# Altium PCB PCB1.PcbDoc
Units mil, origin at the board's own origin, x right, y up, seen from the top; angles counter-clockwise.
Board outline 6000 x 4000 mil, 2 copper layers (Top Layer, Bottom Layer); 71 components, 51 nets, 252 pads, 0 vias.
Unrouted connection lines stored in the file: 175.
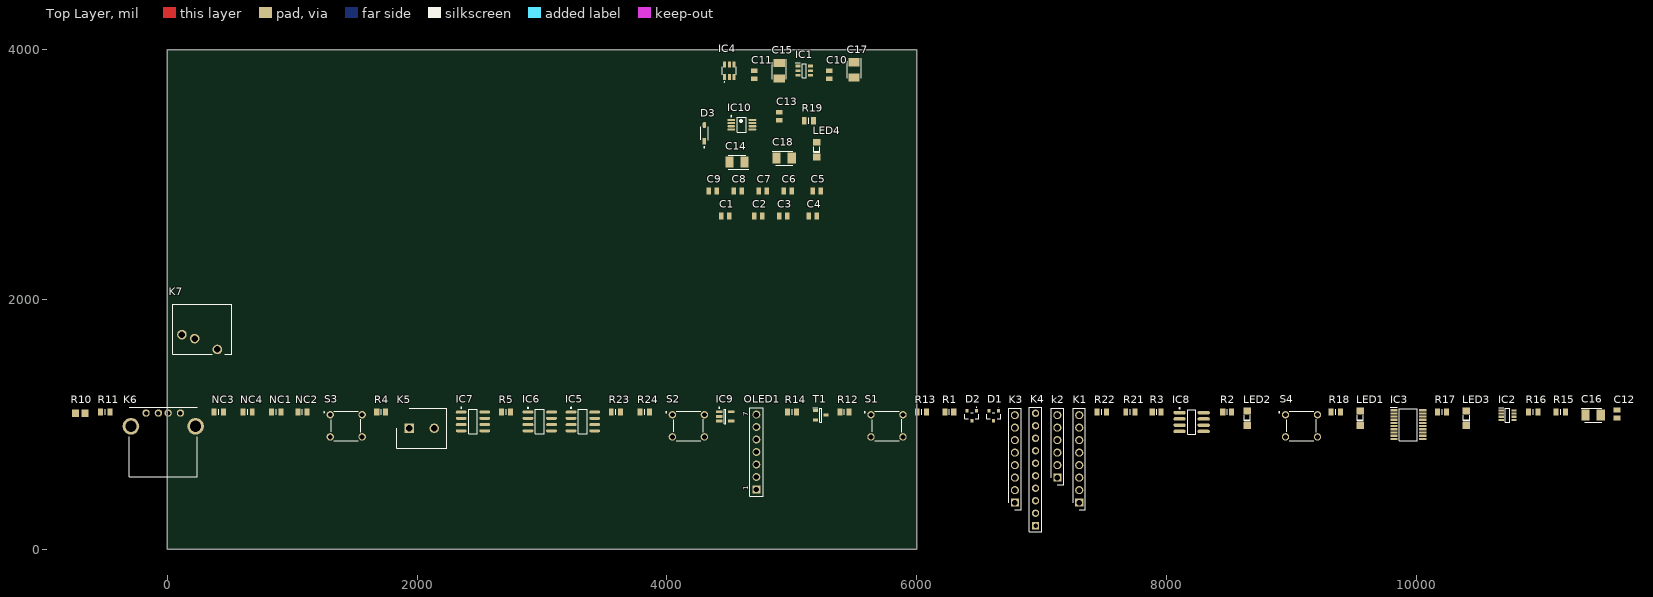
[diagram p0: Top Layer view]
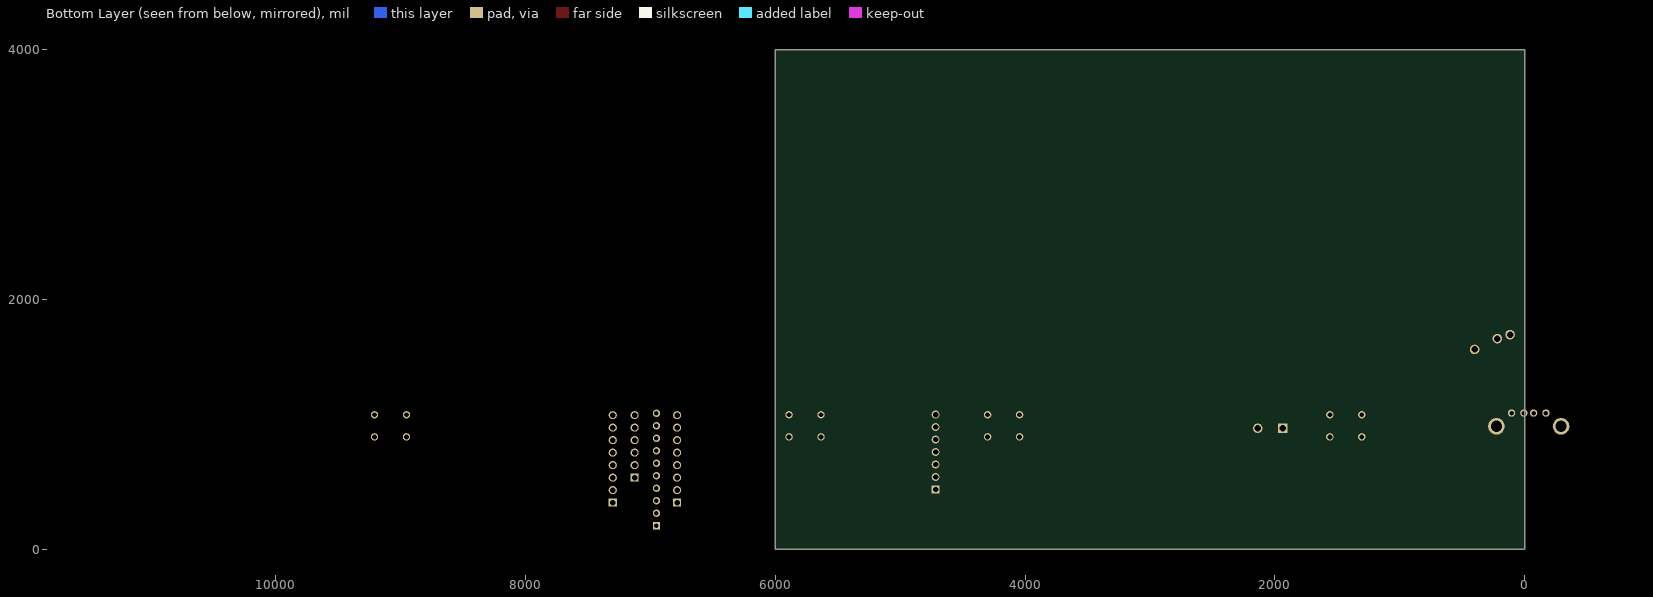
[diagram p1: Bottom Layer view, seen from below]

## Layer stack, top to bottom
Top Solder: solder mask 0.4, Solder Resist, Dk 3.5
Top Layer: signal copper 1.4
Dielectric 1: dielectric 12.6, FR-4, Dk 4.8
Bottom Layer: signal copper 1.4
Bottom Solder: solder mask 0.4, Solder Resist, Dk 3.5

## Board outline
0,0 6000,0 6000,4000 0,4000

## Design rules (kind name [scope] priority, off if disabled: settings)
Clearance [All] p1: gap=10 ignorepadtopadclearanceinfootprint=FALSE except(0: Arc-Hole Track-Hole SMDPad-Hole THPad-Hole Via-Hole Fill-Hole Poly-Hole Region-Hole Text-Hole)
PolygonConnect [All] p1: connectstyle=Relief reliefconductorwidth=10 reliefentries=4 polygonreliefangle="90 Angle" airgapwidth=10
RoomDefinition totaal [InComponentClass('totaal')] p1: confinementstyle=ConfineIn formatcopy=TRUE lockcomponents=FALSE outline 686.89,3871.89 5901.89,3871.89 5901.89,4471.89 686.89,4471.89
RoomDefinition deel2 [InComponentClass('deel2')] p2: confinementstyle=ConfineIn formatcopy=TRUE lockcomponents=FALSE outline -792.95,128.58 11752.05,128.58 11752.05,1248.58 -792.95,1248.58
RoutingVias [All] p1: holewidth=10 width=20 viastyle="Through Hole" minholewidth=10 minwidth=20 maxholewidth=10 maxwidth=20
SolderMaskExpansion [All] p1: expansion=4 istentingtop=FALSE
Width [All] p1: maxlimit=30 minlimit=10 preferedwidth=20 minimp=50.000000 maximp=50.000000 favimp=50.000000
30 further rules are at their usual default settings.

## Classes and differential pairs
component class totaal: C1 C2 C3 C4 C5 C6 C7 C8 C9 C10 C11 C13 C14 C15 C17 C18 D3 IC1 IC4 IC10 K7 LED4 R19
component class deel2: C12 C16 D1 D2 IC2 IC3 IC5 IC6 IC7 IC8 IC9 K1 k2 K3 K4 K5 K6 LED1 LED2 LED3 NC1 NC2 NC3 NC4 OLED1 R1 R2 R3 R4 R5 R10 R11 R12 R13 R14 R15 R16 R17 R18 R21 R22 R23 R24 S1 S2 S3 S4 T1

## Components (designator, comment, footprint, x,y, rotation, side; value= is the part's Value field where it differs from the comment)
C1 "MC0805B104K500CT" CAPC2012X90N 4468.11,2668.11 r180 top
C2 "MC0805B104K500CT" CAPC2012X90N 4731.89,2668.11 r180 top
C3 "MC0805B104K500CT" CAPC2012X90N 4931.89,2668.11 r180 top
C4 "MC0805B104K500CT" CAPC2012X90N 5168.11,2668.11 r180 top
C5 "MC0805B104K500CT" CAPC2012X90N 5200,2868.11 r180 top
C6 "MC0805B104K500CT" CAPC2012X90N 4968.11,2868.11 r180 top
C7 "MC0805B104K500CT" CAPC2012X90N 4768.11,2868.11 r180 top
C8 "MC0805B104K500CT" CAPC2012X90N 4568.11,2868.11 r180 top
C9 "MC0805B104K500CT" CAPC2012X90N 4368.11,2868.11 r180 top
C10 "MC0805B104K500CT" CAPC2012X90N 5300,3800 r90 top
C11 "MC0805B104K500CT" CAPC2012X90N 4700,3800 r90 top
C12 "MC0805B104K500CT" CAPC2012X90N 11607.05,1083.58 r90 top
C13 "MC0805N102J500CT" CAPC2012X90N 4900,3468.11 r90 top
C14 "T491B106M016AT" CAPPM3528X210N 4561.02,3100 r180 top
C15 "T491B106M016AT" CAPPM3528X210N 4900,3831.89 r270 top
C16 "T491B106M016AT" CAPPM3528X210N 11417.05,1073.58 r0 top
C17 "T491B106M016AT" CAPPM3528X210N 5500,3838.98 r270 top
C18 "T491B106M016AT" CAPPM3528X210N 4938.98,3131.89 r0 top
D1 "BAT54C" NXP-SOT23-3_V 6617.05,1068.58 r0 top
D2 "BAT54C" NXP-SOT23-3_V 6442.05,1068.58 r0 top
D3 "1N5819HW-7-F" FP-SOD123-IPC_B 4300,3331.89 r90 top
IC1 "LT1790ACS6-2.5#PBF" SOT95P280X100-6N 5100,3831.89 r0 top
IC2 "LTC2631CTS8-LZ12#TRMPBF" SOT65P280X100-8N 10732.05,1073.58 r0 top
IC3 "LTC2309CF#PBF" SOP65P640X110-20N 9937.05,998.58 r0 top
IC4 "LT1790BCS6-1.25#TRMPBF" LT1790BCS6125TRMPBF 4500,3831.89 r0 top
IC5 "LT1789CS8-1#PBF" LT-S8-8_N 3327.05,1023.58 r0 top
IC6 "LT1789CS8-10#PBF" LT-S8-8_N 2982.05,1023.58 r0 top
IC7 "LT1789CS8-10#PBF" LT-S8-8_N 2447.05,1023.58 r0 top
IC8 "LTC6241HVCS8#PBF" LT-S8-8_M 8202.05,1018.58 r0 top
IC9 "LTC2054HVCS5#TRMPBF" LT-S5-5-TSOT-23_N 4467.05,1063.58 r0 top
IC10 "LT1762EMS8-5#PBF" LT-MS8_N 4600,3400 r0 top
K1 "2211S-08G" HDRV8W64P0X254_1X8_2032X254X874P 7302.05,373.58 r90 top
k2 "2211S-06G" HDRV6W64P0X254_1X6_1524X254X1774P 7127.05,573.58 r90 top
K3 "2211S-08G" HDRV8W64P0X254_1X8_2032X254X874P 6787.05,373.58 r90 top
K4 "Header 10" HDR1X10 6952.05,188.58 r90 top
K5 "1729128" HDRV2W110P0X508_1X2_1016X810X1000P 1937.05,968.58 r0 top
K6 "61400416021" USB-2.0-TYPE-A -32.95,578.58 r0 top
K7 "NEB_J_21_R" NEBJ21R 116.54,1718.11 r0 top
LED1 "150120RS75000" 1206_A 9552.05,1048.58 r90 top
LED2 "150120GS75000" 1206_A 8647.05,1048.58 r90 top
LED3 "150120YS75000" 1206_A 10402.05,1048.58 r90 top
LED4 "150120BS75000" 1206_A 5200,3200 r90 top
NC1 "0" RESC2014X65N 872.05,1098.58 r0 top
NC2 "0" RESC2014X65N 1082.05,1098.58 r0 top
NC3 "MC01W08055100R" RESC2014X65N 412.05,1098.58 r0 top
NC4 "0" RESC2014X65N 642.05,1098.58 r0 top
OLED1 "61300711121" 61300711121 4717.05,778.58 r90 top
R1 "MCTC0525B1000T5E" RESC2012X65N 6262.05,1098.58 r0 top
R2 "MCTC0525B1002T5E" RESC2012X65N 8487.05,1098.58 r0 top
R3 "MCTC0525B1002T5E" RESC2012X65N 7922.05,1098.58 r0 top
R4 "MCTC0525B1002T5E" RESC2012X65N 1712.05,1098.58 r0 top
R5 "MCTC0525B1002T5E" RESC2012X65N 2712.05,1098.58 r0 top
R10 "ERA6AEB223V" RESC2013X60X40ML20T25 -697.95,1088.58 r0 top
R11 "220R 0.1%" RESC2014X65N -497.95,1098.58 r0 top
R12 "MC01W08055100R" RESC2014X65N 5422.05,1098.58 r0 top
R13 "MC01W08055100R" RESC2014X65N 6042.05,1098.58 r0 top
R14 "100R" RESC2014X65N 5002.05,1098.58 r0 top
R15 "3KR" RESC2014X65N 11157.05,1098.58 r0 top
R16 "MC01W0805512K" RESC2014X65N 10937.05,1098.58 r0 top
R17 "MC01W080551K" RESC2014X65N 10207.05,1098.58 r0 top
R18 "MC01W080551K" RESC2014X65N 9357.05,1098.58 r0 top
R19 "MC01W080551K" RESC2014X65N 5137.4,3431.89 r0 top
R21 "MC01W0805510K" RESC2014X65N 7712.05,1098.58 r0 top
R22 "MC01W0805510K" RESC2014X65N 7482.05,1098.58 r0 top
R23 "MC01W0805510K" RESC2014X65N 3592.05,1098.58 r0 top
R24 "22KR" RESC2014X65N 3822.05,1098.58 r0 top
S1 "FSM4JH" FSM4JH 5762.05,988.58 r0 top
S2 "FSM4JH" FSM4JH 4172.05,988.58 r0 top
S3 "FSM4JH" FSM4JH 1432.05,988.58 r0 top
S4 "FSM4JH" FSM4JH 9082.05,988.58 r0 top
T1 "BC847C_AU,215" SOT95P230X110-3N 5232.05,1073.58 r0 top

## Footprints (in the part's own frame and the unit in brackets; to place one, negate y for a bottom-side part, rotate by r counter-clockwise, add the part's x,y. Pads: shape width x height; smd on the part's side, far side on the other; paste and mask are expansions set on the pad)
1206_A [mm] "Chip LED, 2-Leads, Body 3.2x1.6mm, IPC Medium Density"
  rect 1.4x1.5 smd: 1(-1.5,0) 2(1.5,0)
  silkscreen extent -0.5,-0.67 0.6,0.65, body extent -1.6,-0.8 1.6,0.8, height 0.68
61300711121 [mm] "Pin Header, pitch 2.54 mm, THT, Vertical, single row, 7p"
  rect 1.6x1.6 hole 1.1: 1(-7.62,0)
  round 1.6 hole 1.1: 2(-5.08,0) 3(-2.54,0) 4(0,0) 5(2.54,0) 6(5.08,0) 7(7.62,0)
  silkscreen extent -9.04,-1.35 9.04,1.35, body extent -8.89,-1.27 8.89,1.27, height 8.57
CAPC2012X90N [mm]
  rect 0.96x1.39 smd: 1(-0.81,0) 2(0.81,0)
  body extent -1,-0.63 1,0.63, height 0.9
CAPPM3528X210N [mm]
  rect 1.65x2.25 smd: 1(-1.55,0) 2(1.55,0)
  silkscreen extent -2.37,-1.4 1.75,1.4, body extent -1.75,-1.4 1.75,1.4, height 2.1
FP-SOD123-IPC_B [mil]
  rect 49.51x27.66 smd paste+0 mask+0: 1(-64.98,0)
  rrect100% 49.51x27.66 smd paste+0 mask+0: 2(64.98,0)
  silkscreen extent -119,-31 52,31, body extent -100,-40 100,40, height 10
FSM4JH [mm]
  round 1.5 hole 1: 1(-3.25,2.25) 2(3.25,2.25) 3(-3.25,-2.25) 4(3.25,-2.25)
  silkscreen extent -4.6,-3 3,3, body extent -3,-3.9 3,3.9
HDR1X10 [mm] "Connector; Header; 10 Position"
  rect 1.5x1.5 hole 0.9: 1(0,0)
  round 1.5 hole 0.9: 2(2.54,0) 3(5.08,0) 4(7.62,0) 5(10.16,0) 6(12.7,0) 7(15.24,0) 8(17.78,0) 9(20.32,0) 10(22.86,0)
  silkscreen extent -1.27,-1.27 24.13,1.27
HDRV2W110P0X508_1X2_1016X810X1000P [mm]
  rect 1.95x1.95 hole 1.3: 1(0,0)
  round 1.95 hole 1.3: 2(5.08,0)
  silkscreen extent -2.54,-4.05 7.62,4.05, body extent -2.54,-4.05 7.62,4.05, height 10
HDRV6W64P0X254_1X6_1524X254X1774P [mm]
  rect 1.65x1.65 hole 1.1: 1(0,0)
  round 1.65 hole 1.1: 2(2.54,0) 3(5.08,0) 4(7.62,0) 5(10.16,0) 6(12.7,0)
  silkscreen extent -1.45,-1.27 14.15,1.27, body extent -1.27,-1.27 13.97,1.27, height 17.74
HDRV8W64P0X254_1X8_2032X254X874P [mm]
  rect 1.65x1.65 hole 1.1: 1(0,0)
  round 1.65 hole 1.1: 2(2.54,0) 3(5.08,0) 4(7.62,0) 5(10.16,0) 6(12.7,0) 7(15.24,0) 8(17.78,0)
  silkscreen extent -1.45,-1.27 19.23,1.27, body extent -1.27,-1.27 19.05,1.27, height 8.74
LT1790BCS6125TRMPBF [mm]
  rect 0.62x1.22 smd: 1(-0.95,-1.31) 2(0,-1.31) 3(0.95,-1.31) 4(0.95,1.31) 5(0,1.31) 6(-0.95,1.31)
  silkscreen extent -1.45,-2.3 1.45,0.81, body extent -1.45,-0.81 1.45,0.81, height 1.1
LT-MS8_N [mm] "SOP, 8-Leads, Body 3x3mm, Pitch 0.65mm, IPC Medium Density"
  oval 1.6x0.45 smd: 1(-2.15,0.975) 2(-2.15,0.325) 3(-2.15,-0.325) 4(-2.15,-0.975) 5(2.15,-0.975) 6(2.15,-0.325) 7(2.15,0.325) 8(2.15,0.975)
  silkscreen extent -2.27,-1.55 0.95,1.87, body extent -1.55,-1.55 1.55,1.55, height 1.1
LT-S5-5-TSOT-23_N [mm] "SOT23, 5-Leads, Body 2.90x1.63mm, Pitch 0.95mm, IPC Medium Density"
  rect 1.3x0.55 smd: 1(-1.2,0.95) 2(-1.2,0) 3(-1.2,-0.95) 4(1.2,-0.95) 5(1.2,0.95)
  silkscreen extent -1.32,-1.45 0.15,1.9, body extent -0.87,-1.45 0.87,1.45, height 1
LT-S8-8_M [mm] "SOIC, 8-Leads, Body 4.9x3.9mm, Pitch 1.27mm, IPC Low Density"
  oval 2.5x0.7 smd: 1(-2.45,1.905) 2(-2.45,0.635) 3(-2.45,-0.635) 4(-2.45,-1.905) 5(2.45,-1.905) 6(2.45,-0.635) 7(2.45,0.635) 8(2.45,1.905)
  silkscreen extent -2.57,-2.5 0.8,2.93, body extent -2,-2.5 2,2.5, height 1.76
LT-S8-8_N [mm] "SOIC, 8-Leads, Body 4.9x3.9mm, Pitch 1.27mm, IPC Medium Density"
  oval 2.2x0.6 smd: 1(-2.4,1.905) 2(-2.4,0.635) 3(-2.4,-0.635) 4(-2.4,-1.905) 5(2.4,-1.905) 6(2.4,-0.635) 7(2.4,0.635) 8(2.4,1.905)
  silkscreen extent -2.52,-2.5 0.9,2.88, body extent -2,-2.5 2,2.5, height 1.76
NEBJ21R [mm]
  round 1.95 hole 1.3: 1(0,0) 2(2.6,-0.8) 3(7.2,-3)
  silkscreen extent -1.84,-4 10.16,6.2, body extent -1.84,-4 10.16,6.2, height 8.1
NXP-SOT23-3_V [mm] "SOT23, 3-Leads, Body 1.3x2.9mm, Pitch 0.95mm"
  rect 0.6x0.7 smd paste-0.05: 1(0.95,1) 2(-0.95,1) 3(0,-1)
  silkscreen extent -1.45,-0.65 1.45,1.79, body extent -1.45,-0.65 1.45,0.65, height 1.1
RESC2012X65N [mm]
  rect 1.05x1.45 smd: 1(-0.9,0) 2(0.9,0)
  silkscreen extent 0,-0.53 0,0.53, body extent -1,-0.63 1,0.63, height 0.65
RESC2013X60X40ML20T25 [mm] "Chip Resistor, 2-Leads, Body 2.00x1.25mm, IPC Low Density"
  rect 1.4x1.55 smd: 1(-0.95,0) 2(0.95,0)
  body extent -1.1,-0.72 1.1,0.72, height 0.6
RESC2014X65N [mm]
  rect 1x1.5 smd: 1(-0.95,0) 2(0.95,0)
  silkscreen extent 0,-0.59 0,0.59, body extent -1,-0.69 1,0.69, height 0.65
SOP65P640X110-20N [mm]
  rect 1.45x0.45 smd: 1(-2.925,2.925) 2(-2.925,2.275) 3(-2.925,1.625) 4(-2.925,0.975) 5(-2.925,0.325) 6(-2.925,-0.325) 7(-2.925,-0.975) 8(-2.925,-1.625) 9(-2.925,-2.275) 10(-2.925,-2.925) 11(2.925,-2.925) 12(2.925,-2.275) 13(2.925,-1.625) 14(2.925,-0.975) 15(2.925,-0.325) 16(2.925,0.325) 17(2.925,0.975) 18(2.925,1.625) 19(2.925,2.275) 20(2.925,2.925)
  silkscreen extent -3.65,-3.25 1.85,3.5, body extent -3.2,-3.25 3.2,3.25, height 1.1
SOT65P280X100-8N [mm]
  rect 1.05x0.45 smd: 1(-1.3,0.975) 2(-1.3,0.325) 3(-1.3,-0.325) 4(-1.3,-0.975) 5(1.3,-0.975) 6(1.3,-0.325) 7(1.3,0.325) 8(1.3,0.975)
  silkscreen extent -1.83,-1.45 0.43,1.55, body extent -1.4,-1.45 1.4,1.45, height 1
SOT95P230X110-3N [mm]
  rect 1.05x0.6 smd: 1(-1.1,0.95) 2(-1.1,-0.95) 3(1.1,0)
  silkscreen extent -1.63,-1.45 0.23,1.5, body extent -1.15,-1.45 1.15,1.45, height 1.1
SOT95P280X100-6N [mm]
  rect 1.05x0.55 smd: 1(-1.3,0.95) 2(-1.3,0) 3(-1.3,-0.95) 4(1.3,-0.95) 5(1.3,0) 6(1.3,0.95)
  silkscreen extent -1.83,-1.45 0.43,1.58, body extent -1.4,-1.45 1.4,1.45, height 1
USB-2.0-TYPE-A [mm]
  round 1.5 hole 0.92: 1(-3.5,13.01) 2(-1,13.01) 3(1,13.01) 4(3.5,13.01)
  round 3.4 hole 2.3: 5(-6.57,10.3) 6(6.57,10.3)
  silkscreen extent -6.95,0 6.95,14.15

## Part data
C1 C2 C3 C4 C5 C6 C7 C8 C9 C10 C11 C12 C13: "Capacitor", Manufacturer_Name=MULTICOMP, Height=0.9mm
  C1 C2 C3 C4 C5 C6 C7 C8 C9 C10 C11 C12: Datasheet Link=https://componentsearchengine.com/Datasheets/2/MC0805B104K500CT.pdf, Manufacturer_Part_Number=MC0805B104K500CT
  C13: Datasheet Link=http://www.farnell.com/datasheets/1901289.pdf, Manufacturer_Part_Number=MC0805N102J500CT
C14 C15 C16 C17 C18: "Capacitor Polarised", Manufacturer_Name=Kemet, Mouser Part Number=80-T491B106M016, Arrow Part Number=T491B106M016AT, Arrow Price/Stock=https://www.arrow.com/en/products/t491b106m016at/kemet-corporation, Datasheet Link=https://componentsearchengine.com/Datasheets/2/T491B106M016AT.pdf, Height=2.1mm, Manufacturer_Part_Number=T491B106M016AT, Mouser Price/Stock=https://www.mouser.co.uk/ProductDetail/KEMET/T491B106M016AT?qs=WydH9nGI6cAnkEyQJLjSzA%3D%3D
D1 D2: library part CMP-0417-00003-1, "Schottky Barrier Diode, 30 V, 2 uA, -55 to 150 degC, 3-Pin SOT23, RoHS, Tape and Reel", Manufacturer="NXP Semiconductors", Temperature Range="-55 to 150 degC", Cd (pF)=10, ComponentLink1Description="Manufacturer URL", ComponentLink1URL=http://www.nxp.com/, ComponentLink2Description=Datasheet, ComponentLink2URL=http://www.nxp.com/documents/data_sheet/BAT54_SER.pdf, DatasheetVersion="Rev. 5", IR (uA)=2, Mounting Technology="Surface Mount", PackageDescription="3-Pin Plastic Surface-mounted Package, Body 1.3 x 2.9 mm, Pitch 0.95 mm", PackageReference=SOT23-3, Packing="Tape and Reel", PartNumber=BAT54C, RoHS=TRUE, Rth(j-a) (K/W)=500, Trr (ns)=5, VF (mV)=800, VR (V)=30
D3: library part CMP-0303-00003-3, "DIODE SCHOTTKY 40V 1A SOD123", Average Rectified Current=1A, Capacitance=110pF, Case/Package=SOD-123-2, Forward Voltage=450mV, Max Forward Surge Current (Ifsm)=25A, Max Operating Temperature=125°C, Max Power Dissipation=450mW, Max Repetitive Reverse Voltage (Vrrm)=40V, Min Operating Temperature=-65°C, Package Quantity=3000, Peak Reverse Current=50uA, Contact Plating=Tin, Current Rating=1A, Element Configuration=Single, Forward Current=1A, Height=1.25mm, Lead Free="Lead Free", Length=2.85mm, Max Reverse Voltage (DC)=40V, Number of Pins=2, Output Current=1A, Packaging="Tape and Reel", Peak Non-Repetitive Surge Current=25A, Polarity=Standard, Radiation Hardening=No, REACH SVHC="No SVHC", Termination=SMD/SMT, Voltage Rating (DC)=40V, Weight=0.000353oz, Width=1.7mm
IC1: "Integrated Circuit", Manufacturer_Name="Linear Technology", Mouser Part Number=584-1790ACS6-2.5PBF, Datasheet Link=https://componentsearchengine.com/Datasheets/2/LT1790ACS6-2.5#PBF.pdf, Height=1mm, Manufacturer_Part_Number=LT1790ACS6-2.5#PBF, Mouser Price/Stock=https://www.mouser.com/Search/Refine.aspx?Keyword=584-1790ACS6-2.5PBF
IC2: "Integrated Circuit", Manufacturer_Name="Analog Devices", Mouser Part Number=584-2631CTS8LZ12TMPF, Arrow Part Number=LTC2631CTS8-LZ12#TRMPBF, Arrow Price/Stock=https://www.arrow.com/en/products/ltc2631cts8-lz12trmpbf/analog-devices, Datasheet Link=https://www.analog.com/media/en/technical-documentation/data-sheets/2631fd.pdf, Height=1mm, Manufacturer_Part_Number=LTC2631CTS8-LZ12#TRMPBF, Mouser Price/Stock=https://www.mouser.co.uk/ProductDetail/Analog-Devices/LTC2631CTS8-LZ12TRMPBF?qs=hVkxg5c3xu%252BAZArayp8N8g%3D%3D
IC3: "Integrated Circuit", Manufacturer_Name="Linear Technology", Mouser Part Number=584-LTC2309CF#PBF, Arrow Part Number=LTC2309CF#PBF, Arrow Price/Stock=https://www.arrow.com/en/products/ltc2309cfpbf/linear-technology, Datasheet Link=http://docs-emea.rs-online.com/webdocs/10c2/0900766b810c2cad.pdf, Height=1.1mm, Manufacturer_Part_Number=LTC2309CF#PBF, Mouser Price/Stock=https://www.mouser.com/Search/Refine.aspx?Keyword=584-LTC2309CF%23PBF
IC4: "Integrated Circuit", Manufacturer_Name="Analog Devices", Mouser Part Number=584-1790BCS61.25TMPF, Arrow Part Number=LT1790BCS6-1.25#TRMPBF, Arrow Price/Stock=https://www.arrow.com/en/products/lt1790bcs6-1.25trmpbf/analog-devices, Datasheet Link=https://www.arrow.com/en/products/lt1790bcs6-1.25trmpbf/analog-devices, Height=1mm, Manufacturer_Part_Number=LT1790BCS6-1.25#TRMPBF, Mouser Price/Stock=https://www.mouser.co.uk/ProductDetail/Analog-Devices/LT1790BCS6-125TRMPBF/?qs=ytflclh7QUXpPD13KZ8jjg%3D%3D
IC5: library part CMP-0359-03660-2, "Single Channel, Micropower, Single Supply Rail-to-Rail Output Instrumentation Amplifiers, 0.06 MHz Typical GBW, 0.026 V/us Typical SR, 2.2 to 36 V, 8-Pin SOIC (S8-8), Commercial, Pb-Free", Linear Technology Part Number=LT1789-1, Manufacturer="Linear Technology", Channels (#)=1, ComponentLink1Description="Manufacturer URL", ComponentLink1URL=http://www.linear.com/, ComponentLink2Description=Datasheet, ComponentLink2URL=http://cds.linear.com/docs/en/datasheet/1789fc.pdf, ComponentLink3Description="Package Specification", ComponentLink3URL=http://cds.linear.com/docs/en/packaging/05081610_G_SO8.pdf, DatasheetVersion="Rev. C", GBW (MHz) Typical=0.06, Is (mA) Typical=0.067, Mounting Technology="Surface Mount", PackageDescription="8-Pin Plastic Small Outline, Body 4.9 x 3.9 mm, Pitch 1.27 mm", PackageReference=LT-S8-8, PackageVersion="Rev G", PartNumber=LT1789CS8-1#PBF, RevisionNote="URLs updated", RoHS=Pb-Free, SR (V/us) Typical=0.026, Type=IA, Vos (mV) Guaranteed=0.75, Vos (mV) Typical=0.15, Vs Max (V)=36, Vs Min (V)=2.2
IC6 IC7: library part CMP-0359-03644-3, "Single Channel, Micropower, Single Supply Rail-to-Rail Output Instrumentation Amplifiers, 0.06 MHz Typical GBW, 0.026 V/us Typical SR, 2.2 to 36 V, 8-Pin SOIC (S8-8), Commercial, Pb-Free", Linear Technology Part Number=LT1789-10, Manufacturer="Linear Technology", Channels (#)=1, ComponentLink1Description="Manufacturer URL", ComponentLink1URL=http://www.linear.com/, ComponentLink2Description=Datasheet, ComponentLink2URL=http://cds.linear.com/docs/en/datasheet/1789fc.pdf, ComponentLink3Description="Package Specification", ComponentLink3URL=http://cds.linear.com/docs/en/packaging/05081610_G_SO8.pdf, DatasheetVersion="Rev. C", GBW (MHz) Typical=0.06, Is (mA) Typical=0.067, Mounting Technology="Surface Mount", PackageDescription="8-Pin Plastic Small Outline, Body 4.9 x 3.9 mm, Pitch 1.27 mm", PackageReference=LT-S8-8, PackageVersion="Rev G", PartNumber=LT1789CS8-10#PBF, RevisionNote="URLs updated", RoHS=Pb-Free, SR (V/us) Typical=0.026, Type=IA, Vos (mV) Guaranteed=3, Vos (mV) Typical=0.65, Vs Max (V)=36, Vs Min (V)=2.2
IC8: library part CMP-0359-02698-2, "Dual Channel, Low Noise, CMOS Operational Amplifier, RRO, 18 MHz Typical GBW, 10 V/us Typical SR, 2.8 to 12 V, 8-Pin SOIC (S8-8), Commercial, Pb-Free", Linear Technology Part Number=LTC6241HV, Manufacturer="Linear Technology", Channels (#)=2, ComponentLink1Description="Manufacturer URL", ComponentLink1URL=http://www.linear.com/, ComponentLink2Description=Datasheet, ComponentLink2URL=http://cds.linear.com/docs/en/datasheet/624012fe.pdf, ComponentLink3Description="Package Specification", ComponentLink3URL=http://cds.linear.com/docs/en/packaging/05081610_G_SO8.pdf, DatasheetVersion="Rev. E", GBW (MHz) Typical=18, Is (mA) Typical=1.8, Mounting Technology="Surface Mount", PackageDescription="8-Pin Plastic Small Outline, Body 4.9 x 3.9 mm, Pitch 1.27 mm", PackageReference=LT-S8-8, PackageVersion="Rev G", PartNumber=LTC6241HVCS8#PBF, RevisionNote="URLs updated", RoHS=Pb-Free, SR (V/us) Typical=10, Type=VFB, Vos (mV) Typical=0.04, Vs Max (V)=12, Vs Min (V)=2.8
IC9: library part CMP-0359-02161-2, "Single Channel, Micropower Zero-Drift Operational Amplifier, 0.5 MHz Typical GBW, 0.5 V/us Typical SR, 2.7 to 11 V, 5-Pin SOT23 (S5-5), Commercial, Pb-Free, Mini Reel", Linear Technology Part Number=LTC2054HV, Manufacturer="Linear Technology", Channels (#)=1, Code_JEDEC=MO-193, ComponentLink1Description="Manufacturer URL", ComponentLink1URL=http://www.linear.com/, ComponentLink2Description=Datasheet, ComponentLink2URL=http://cds.linear.com/docs/en/datasheet/20545fc.pdf, ComponentLink3Description="Package Specification", ComponentLink3URL=http://cds.linear.com/docs/en/packaging/SOT_5_05-08-1635.pdf, DatasheetVersion="Rev. C", GBW (MHz) Typical=0.5, Is (mA) Typical=0.15, Mounting Technology="Surface Mount", PackageDescription="5-Lead Plastic TSOT-23, Body 1.63 x 2.90 mm, Pitch 0.95 mm", PackageReference=LT-S5-5-TSOT-23, Packing="Mini Reel", PartNumber=LTC2054HVCS5#TRMPBF, RevisionNote="URLs updated", RoHS=Pb-Free, SR (V/us) Typical=0.5, Type=ZD, Vos (mV) Typical=0.0005, Vs Max (V)=11, Vs Min (V)=2.7
IC10: library part CMP-0476-00707-1, "150 mA, Low Noise, LDO Micropower Regulator, 1.8 to 20 V Vin, 5 V Vout, 8-pin SOP (MS8-8), -40 to 125 degC, Pb-Free", Dropout Voltage(V)=0.27, Manufacturer="Linear Technology", Output Voltage="5 V", Shutdown Current(uA)=1, ComponentLink1Description="Manufacturer URL", ComponentLink1URL=http://www.linear.com/, ComponentLink2Description=Datasheet, ComponentLink2URL=http://cds.linear.com/docs/en/datasheet/1762fa.pdf, ComponentLink3Description="Package Specification", ComponentLink3URL=http://cds.linear.com/docs/en/packaging/05081660_G_MS8.pdf, DatasheetVersion="Rev. A", Discrete Pass Element=no, Iout(mA)=150, Isupply(mA)=0.025, Mounting Technology="Surface Mount", Noise(uV)=20, Number of Outputs=1, PackageDescription="8-Pin Plastic MSOP, Body 3 x 3 mm, Pitch 0.65 mm", PackageReference=MS8, PackageVersion="Rev. G, 05/2013", PartNumber=LT1762EMS8-5#PBF, PSRR(dB)=65, RoHS=TRUE, Vin Max(V)=20, Vin Min(V)=1.8
K1 k2 K3: "Connector", Manufacturer_Name=MULTICOMP
  K1 K3: Datasheet Link=https://componentsearchengine.com/Datasheets/2/2211S-08G.pdf, Height=8.74mm, Manufacturer_Part_Number=2211S-08G
  k2: Datasheet Link=http://www.farnell.com/datasheets/1518407.pdf, Height=17.74mm, Manufacturer_Part_Number=2211S-06G
K4: "Header, 10-Pin", LatestRevisionDate=17-Jul-2002, LatestRevisionNote="Re-released for DXP Platform.", Publisher="Altium Limited"
K5: "Connector", Manufacturer_Name="Phoenix Contact", Mouser Part Number=651-1729128, Arrow Part Number=1729128, Arrow Price/Stock=https://www.arrow.com/en/products/1729128/phoenix-contact, Datasheet Link=http://docs-emea.rs-online.com/webdocs/1380/0900766b81380189.pdf, Height=10mm, Manufacturer_Part_Number=1729128, Mouser Price/Stock=https://www.mouser.co.uk/ProductDetail/Phoenix-Contact/1729128/?qs=GFUSqQMLmmnCBVBY3dts9w%3D%3D
K6: "Connector", Manufacturer_Name="Wurth Elektronik", Mouser Part Number=710-61400416021, Datasheet Link=http://katalog.we-online.de/em/datasheet/61400416021.pdf, Manufacturer_Part_Number=61400416021, Mouser Price/Stock=https://www.mouser.co.uk/ProductDetail/Wurth-Elektronik/61400416021/?qs=rS3zZhy2AQM1ZldAqz%2FFOw%3D%3D
K7: "Connector", Manufacturer_Name=LUMBERG, Manufacturer_Part_Number="NEB/J 21 R", Datasheet Link=http://www.farnell.com/datasheets/2047481.pdf?_ga=2.269136052.479969064.1560760329-167411096.1502103357, Height=8mm
LED1: library part CMP-1426-00013-1, "SMD mono-color Chip LED, WL-SMCW, Red", Color=Red, Manufacturer="Wuerth Elektronik", ComponentLink1Description="Manufacturer URL", ComponentLink1URL=http://www.we-online.com, ComponentLink2Description=Datasheet, ComponentLink2URL=http://katalog.we-online.com/led/datasheet/150120RS75000.pdf, PackageReference=1206_A, PartNumber=150120RS75000
LED2: library part CMP-1426-00014-1, "SMD mono-color Chip LED, WL-SMCW, Green", Color=Green, Manufacturer="Wuerth Elektronik", ComponentLink1Description="Manufacturer URL", ComponentLink1URL=http://www.we-online.com, ComponentLink2Description=Datasheet, ComponentLink2URL=http://katalog.we-online.com/led/datasheet/150120GS75000.pdf, PackageReference=1206_A, PartNumber=150120GS75000
LED3: library part CMP-1426-00019-1, "SMD mono-color Chip LED, WL-SMCW, Yellow", Color=Yellow, Manufacturer="Wuerth Elektronik", ComponentLink1Description="Manufacturer URL", ComponentLink1URL=http://www.we-online.com, ComponentLink2Description=Datasheet, ComponentLink2URL=http://katalog.we-online.com/led/datasheet/150120YS75000.pdf, PackageReference=1206_A, PartNumber=150120YS75000
LED4: library part CMP-1426-00015-1, "SMD mono-color Chip LED, WL-SMCW, Blue", Color=Blue, Manufacturer="Wuerth Elektronik", ComponentLink1Description="Manufacturer URL", ComponentLink1URL=http://www.we-online.com, ComponentLink2Description=Datasheet, ComponentLink2URL=http://katalog.we-online.com/led/datasheet/150120BS75000.pdf, PackageReference=1206_A, PartNumber=150120BS75000
NC1 NC2 NC4 R11 R14 R15 R24: library part MC01W08055100R, "Resistor", Manufacturer_Name=MULTICOMP, Datasheet Link=http://www.farnell.com/datasheets/1729047.pdf, Height=0.65mm, Manufacturer_Part_Number=MC01W08055100R
NC3 R1 R2 R3 R4 R5 R12 R13 R16 R17 R18 R19 R21 R22 R23: "Resistor", Manufacturer_Name=MULTICOMP, Height=0.65mm
  NC3 R12 R13: Datasheet Link=http://www.farnell.com/datasheets/1729047.pdf, Manufacturer_Part_Number=MC01W08055100R
  R1: Datasheet Link=https://componentsearchengine.com/Datasheets/2/MCTC0525B1001T5E.pdf, Manufacturer_Part_Number=MCTC0525B1000T5E
  R2 R3 R4 R5: Datasheet Link=https://componentsearchengine.com/Datasheets/2/MCTC0525B1001T5E.pdf, Manufacturer_Part_Number=MCTC0525B1002T5E
  R16: Datasheet Link=http://www.farnell.com/datasheets/1729047.pdf, Manufacturer_Part_Number=MC01W0805512K
  R17 R18 R19: Datasheet Link=http://www.farnell.com/datasheets/1729047.pdf, Manufacturer_Part_Number=MC01W080551K
  R21 R22 R23: Datasheet Link=http://www.farnell.com/datasheets/1729047.pdf, Manufacturer_Part_Number=MC01W0805510K
OLED1: library part CMP-1502-01074-1, "THT Vertical Pin Header WR-PHD, Pitch 2.54 mm, Single Row, 7 pins", Contact Resistance=20mOhm, Manufacturer="Wurth Elektronik", Operating Temperature=-40to105degC, Rated Current=3A, Withstanding Voltage=500VAC, Working Voltage=250VAC, Datasheet URL=https://katalog.we-online.de/em/datasheet/6130xx11121.pdf, Gender=Male, Manufacturer URL=http://www.we-online.de, Mounting Technology=THT, Orientation=Vertical, Package Reference=61300711121, Packaging=Bag, Part Number=61300711121, Pin Number=7, Pitch=2.54mm, Publisher=WurthElektronik, Row Number=Single
R10: library part CMP-2001-00614-1, Manufacturer=Panasonic, Part Number=ERA6AEB223V
S1 S2 S3 S4: "Switch", Manufacturer_Name="TE Connectivity", Mouser Part Number=506-FSM4JH, Arrow Part Number=FSM4JH, Arrow Price/Stock=https://www.arrow.com/en/products/fsm4jh/te-connectivity, Datasheet Link=http://www.te.com/commerce/DocumentDelivery/DDEController?Action=showdoc&DocId=Customer+Drawing%7F1825910%7FC9%7Fpdf%7FEnglish%7FENG_CD_1825910_C9.pdf%7F1825910-6, Manufacturer_Part_Number=FSM4JH, Mouser Price/Stock=https://www.mouser.co.uk/ProductDetail/TE-Connectivity-Alcoswitch/FSM4JH/?qs=g%252BEszo6zu8OwVWrHD2r3Rw%3D%3D
T1: "Transistor BJT NPN", Manufacturer_Name=Nexperia, Manufacturer_Part_Number=BC847C/AU,215, Datasheet Link=http://assets.nexperia.com/documents/data-sheet/BC847_SER.pdf, Height=1.1mm

## Nets (pads, with @x,y where several pads share a name; then routed paths per layer and width w, separated by ;. In a path a pad name is that pad's centre, name@x,y a point inside that pad or via, vN(x,y) a via of type N, cw(c..) or ccw(c..) an arc to the next point about the centre after c; other vN are vias at no path point)
+1.25: C11.2 C15.1 IC3.15 IC3.17 IC4.6 IC6.5 IC7.5
+2.5: C10.2 C12.1 C17.1 IC1.6 IC2.6 IC3.20
+5: C1.1 C2.1 C3.1 C4.1 C13.2 C18.1 D1.3 D2.3 IC1.4 IC2.5 IC3.3 IC3.10 IC4.4 IC10.1 IC10.2 R19.2 R21.2 R22.2
GND: C1.2 C2.2 C3.2 C4.2 C5.1 C6.1 C7.1 C8.1 C9.1 C10.1 C11.1 C12.2 C14.2 C15.2 C16.2 C17.2 IC1.1 IC1.2 IC2.1 IC2.4 IC2.8 IC3.2 IC3.4 IC3.5 IC3.8 IC3.9 IC3.11 IC3.13 IC3.19 IC4.1 IC4.2 IC5.4 IC5.5 IC6.4 IC7.4 IC8.4 IC10.4 K1.3 K1.6 K1.7 K4.7 K5.1 K6.4 K7.1 LED3.1 OLED1.1 OLED1.7 R2.1 R4.1 R15.1 R23.1 S1.1 S1.2 S2.1 S2.2 S3.1 S3.2 S4.1 S4.2
NetC13_1: C13.1 IC10.3
NetC16_1: C16.1 IC3.1
NetC18_2: C18.2 LED4.1
NetD1_2: D1.2 IC3.14 R12.2
NetD2_1: D2.1 IC3.18 R14.2
NetD2_2: D2.2 IC3.16 R13.2
NetD3_2: D3.2 K7.2
NetIC2_2: IC2.2 IC3.6 K4.10 R21.1
NetIC2_3: IC2.3 IC3.7 K4.9 R22.1
NetIC2_7: IC2.7 IC8.3
NetIC3_12: IC3.12 R4.2 R5.1
NetIC5_1: IC5.1 NC1.2
NetIC5_2: IC5.2 IC6.2 IC7.2 IC8.1 IC8.5 IC8.6 IC9.3 K5.2 K6.1 R1.2 R3.1
NetIC5_3: IC5.3 IC6.3 IC7.3 R1.1 T1.2
NetIC5_6: IC5.6 R12.1
NetIC5_8: IC5.8 NC2.2
NetIC6_1: IC6.1 NC3.2
NetIC6_6: IC6.6 R13.1
NetIC6_8: IC6.8 NC4.2
NetIC7_1: IC7.1 R10.2
NetIC7_6: IC7.6 R14.1
NetIC7_8: IC7.8 R11.2
NetIC8_2: IC8.2 R2.2 R3.2
NetIC8_7: IC8.7 T1.1
NetIC9_1: IC9.1 IC9.4 R5.2
NetK1_5: K1.5 OLED1.2
Netk2_1: k2.1 R17.2
Netk2_2: k2.2 R15.2 R16.1
Netk2_3: k2.3 R18.2
Netk2_4: k2.4 LED1.1 LED2.2
NetK3_3: K3.3 S1.3 S1.4
NetK3_4: K3.4 S2.3 S2.4
NetK3_5: K3.5 S3.3 S3.4
NetK3_6: K3.6 R23.2 R24.1
NetK3_7: K3.7
NetK3_8: K3.8 OLED1.6
NetK4_3: K4.3 OLED1.5
NetK4_4: K4.4 OLED1.4
NetK4_6: K4.6 OLED1.3
NetLED1_2: LED1.2 LED2.1 R18.1
NetLED3_2: LED3.2 R17.1
NetLED4_2: LED4.2 R19.1
NetNC1_1: NC1.1 NC2.1
NetNC3_1: NC3.1 NC4.1
NetR10_1: R10.1 R11.1
NetS4_3: S4.3 S4.4
VCC: C5.2 C6.2 C7.2 C8.2 C9.2 C14.1 D3.1 IC5.7 IC6.7 IC7.7 IC8.8 IC10.5 IC10.8 R16.2 R24.2 T1.3
pads on no net: D1.1 IC1.3 IC1.5 IC4.3 IC4.5 IC9.2 IC9.5 IC10.6 IC10.7 K1.1 K1.2 K1.4 K1.8 k2.5 k2.6 K3.1 K3.2 K4.1 K4.2 K4.5 K4.8 K6.2 K6.3 K6.5 K6.6 K7.3

## Text inside footprints (layer, text, board x,y; h text height)
OLED1: Top Overlay "1" at 4650.12,473.86 h40 r90; Top Overlay "7" at 4650.12,1063.62 h40 r90